# EAGLE board 64panel (EAGLE 9.1.0)
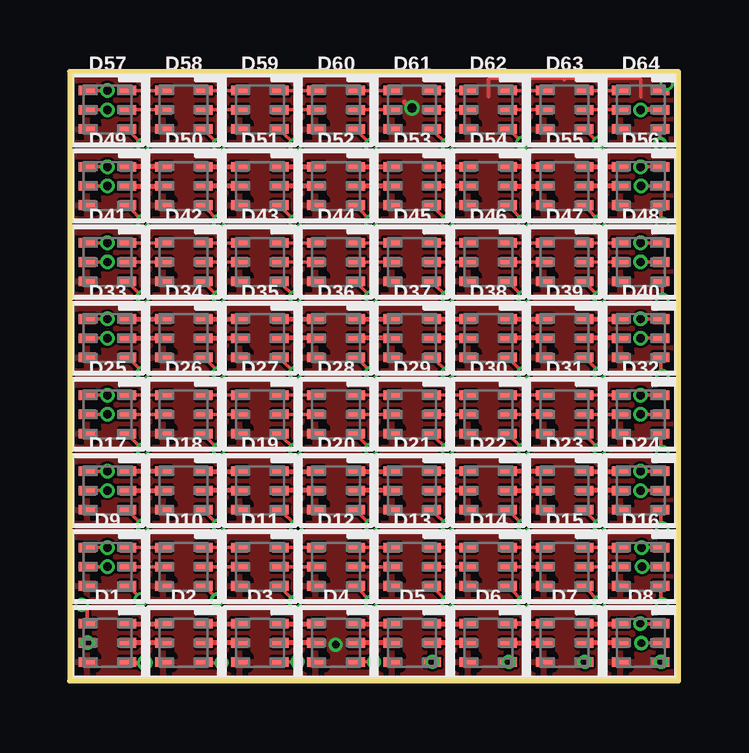
[diagram p0: board, top side]
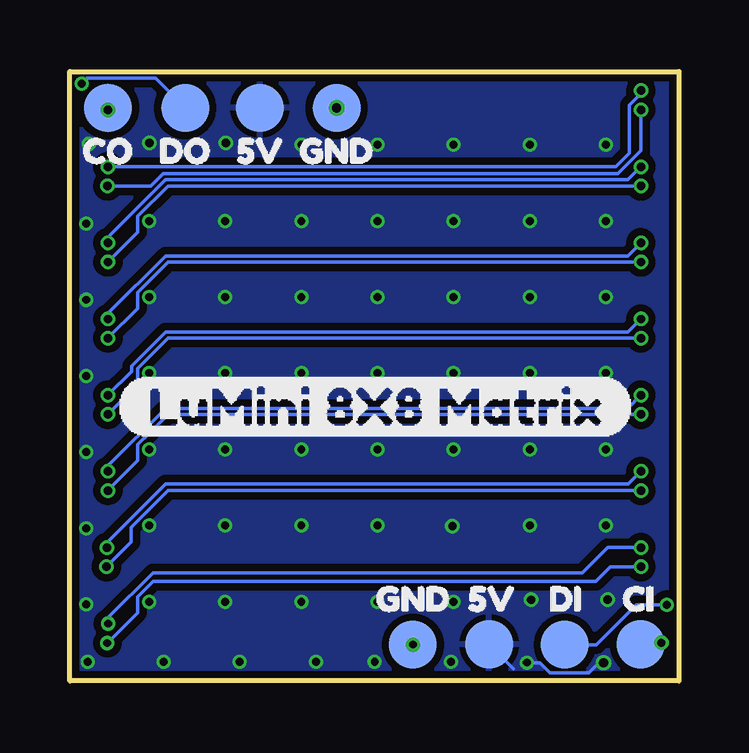
[diagram p1: board, bottom side, seen from below]

Size 25.4 x 25.4 mm. Coordinates in mm from the lower left corner, seen from the top.
Outline: 0,0 25.4,0 25.4,25.4 0,25.4 0,0
Copper layers (1*16): Top 0.035mm / dielectric 1.5mm / Bottom 0.035mm
Design rules "SparkFun-2-layer-FAB-LIMIT": minimum track width 4mil, minimum drill 6mil, track to track 4mil, track to pad 4mil, pad to pad 4mil, via to via 4mil, smd to smd 4mil, copper to edge 4mil, drill to drill 4mil, minimum pad ring 5mil, minimum via ring 5mil, stop-mask expansion 4mil, vias tented up to drill 25mil, thermal gap 10mil

## Footprints (pad centres in the part's own frame; a part is rotated, then mirrored left to right if it is on the bottom)
APA102-2020 = smd 0.7 x 0.4: CKI -0.85,0; CKO 0.85,0; GND -0.85,-0.8; SDI -0.85,0.8; SDO 0.85,0.8; VDD 0.85,-0.8
CIRCULARPAD = smd 2 x 2: P$1 0,0

## Placement (x,y rotation side)
D1  APA1022020  [APA102-2020]  1.59,1.59 0 top
D2  APA1022020  [APA102-2020]  4.76,1.59 0 top
D3  APA1022020  [APA102-2020]  7.94,1.59 0 top
D4  APA1022020  [APA102-2020]  11.11,1.59 0 top
D5  APA1022020  [APA102-2020]  14.29,1.59 0 top
D6  APA1022020  [APA102-2020]  17.46,1.59 0 top
D7  APA1022020  [APA102-2020]  20.64,1.59 0 top
D8  APA1022020  [APA102-2020]  23.81,1.59 0 top
D9  APA1022020  [APA102-2020]  1.59,4.76 0 top
D10  APA1022020  [APA102-2020]  4.76,4.76 0 top
D11  APA1022020  [APA102-2020]  7.94,4.76 0 top
D12  APA1022020  [APA102-2020]  11.11,4.76 0 top
D13  APA1022020  [APA102-2020]  14.29,4.76 0 top
D14  APA1022020  [APA102-2020]  17.46,4.76 0 top
D15  APA1022020  [APA102-2020]  20.64,4.76 0 top
D16  APA1022020  [APA102-2020]  23.81,4.76 0 top
D17  APA1022020  [APA102-2020]  1.59,7.94 0 top
D18  APA1022020  [APA102-2020]  4.76,7.94 0 top
D19  APA1022020  [APA102-2020]  7.94,7.94 0 top
D20  APA1022020  [APA102-2020]  11.11,7.94 0 top
D21  APA1022020  [APA102-2020]  14.29,7.94 0 top
D22  APA1022020  [APA102-2020]  17.46,7.94 0 top
D23  APA1022020  [APA102-2020]  20.64,7.94 0 top
D24  APA1022020  [APA102-2020]  23.81,7.94 0 top
D25  APA1022020  [APA102-2020]  1.59,11.11 0 top
D26  APA1022020  [APA102-2020]  4.76,11.11 0 top
D27  APA1022020  [APA102-2020]  7.94,11.11 0 top
D28  APA1022020  [APA102-2020]  11.11,11.11 0 top
D29  APA1022020  [APA102-2020]  14.29,11.11 0 top
D30  APA1022020  [APA102-2020]  17.46,11.11 0 top
D31  APA1022020  [APA102-2020]  20.64,11.11 0 top
D32  APA1022020  [APA102-2020]  23.81,11.11 0 top
D33  APA1022020  [APA102-2020]  1.59,14.29 0 top
D34  APA1022020  [APA102-2020]  4.76,14.29 0 top
D35  APA1022020  [APA102-2020]  7.94,14.29 0 top
D36  APA1022020  [APA102-2020]  11.11,14.29 0 top
D37  APA1022020  [APA102-2020]  14.29,14.29 0 top
D38  APA1022020  [APA102-2020]  17.46,14.29 0 top
D39  APA1022020  [APA102-2020]  20.64,14.29 0 top
D40  APA1022020  [APA102-2020]  23.81,14.29 0 top
D41  APA1022020  [APA102-2020]  1.59,17.46 0 top
D42  APA1022020  [APA102-2020]  4.76,17.46 0 top
D43  APA1022020  [APA102-2020]  7.94,17.46 0 top
D44  APA1022020  [APA102-2020]  11.11,17.46 0 top
D45  APA1022020  [APA102-2020]  14.29,17.46 0 top
D46  APA1022020  [APA102-2020]  17.46,17.46 0 top
D47  APA1022020  [APA102-2020]  20.64,17.46 0 top
D48  APA1022020  [APA102-2020]  23.81,17.46 0 top
D49  APA1022020  [APA102-2020]  1.59,20.64 0 top
D50  APA1022020  [APA102-2020]  4.76,20.64 0 top
D51  APA1022020  [APA102-2020]  7.94,20.64 0 top
D52  APA1022020  [APA102-2020]  11.11,20.64 0 top
D53  APA1022020  [APA102-2020]  14.29,20.64 0 top
D54  APA1022020  [APA102-2020]  17.46,20.64 0 top
D55  APA1022020  [APA102-2020]  20.64,20.64 0 top
D56  APA1022020  [APA102-2020]  23.81,20.64 0 top
D57  APA1022020  [APA102-2020]  1.59,23.81 0 top
D58  APA1022020  [APA102-2020]  4.76,23.81 0 top
D59  APA1022020  [APA102-2020]  7.94,23.81 0 top
D60  APA1022020  [APA102-2020]  11.11,23.81 0 top
D61  APA1022020  [APA102-2020]  14.29,23.81 0 top
D62  APA1022020  [APA102-2020]  17.46,23.81 0 top
D63  APA1022020  [APA102-2020]  20.64,23.81 0 top
D64  APA1022020  [APA102-2020]  23.81,23.81 0 top
FRAME1  FRAME-LEDGER  [CREATIVE_COMMONS]  20.32,-8.89 0 top  (outside the outline)
J1  LED_PADCIRCULARPAD  [CIRCULARPAD]  23.81,23.89 0 bottom
J2  LED_PADCIRCULARPAD  [CIRCULARPAD]  20.59,23.89 0 bottom
J3  LED_PADCIRCULARPAD  [CIRCULARPAD]  4.76,1.51 0 bottom
J4  LED_PADCIRCULARPAD  [CIRCULARPAD]  1.6,1.52 0 bottom
J5  LED_PADCIRCULARPAD  [CIRCULARPAD]  7.92,1.52 0 bottom
J6  LED_PADCIRCULARPAD  [CIRCULARPAD]  14.27,23.89 0 bottom
J7  LED_PADCIRCULARPAD  [CIRCULARPAD]  11.1,1.51 0 bottom
J8  LED_PADCIRCULARPAD  [CIRCULARPAD]  17.48,23.89 0 bottom
LOGO1  SFE_LOGO_NAME_FLAME.2_INCH  [SFE_LOGO_NAME_FLAME_.2]  10.16,-17.78 0 top  (outside the outline)
U$1  [5V5]  9.69,3.43 0 bottom
U$2  [5V5]  19.35,22.1 0 bottom
U$3  [CI1]  3.28,3.43 0 bottom
U$4  [CO3]  25.77,22.1 0 bottom
U$5  [DI2]  6.32,3.43 0 bottom
U$6  [DO4]  22.59,22.1 0 bottom
U$7  [GND6]  16.73,22.1 0 bottom
U$8  [GND6]  13.53,3.43 0 bottom
U$9  [LUMINI_8X8_MATRIX0]  23.5,11.43 0 bottom

## Library data of the parts
D1-D64 = SparkFun-LED; PROD_ID: DIO-13883
FRAME1 LOGO1 = SparkFun-Aesthetics
J1-J8 = Andy
U$1-U$9 = buzzard_labels (4)

## Nets
5V: D1.VDD D2.VDD D3.VDD D4.VDD D5.VDD D6.VDD D7.VDD D8.VDD D9.VDD D10.VDD D11.VDD D12.VDD D13.VDD D14.VDD D15.VDD D16.VDD D17.VDD D18.VDD D19.VDD D20.VDD D21.VDD D22.VDD D23.VDD D24.VDD D25.VDD D26.VDD D27.VDD D28.VDD D29.VDD D30.VDD D31.VDD D32.VDD D33.VDD D34.VDD D35.VDD D36.VDD D37.VDD D38.VDD D39.VDD D40.VDD D41.VDD D42.VDD D43.VDD D44.VDD D45.VDD D46.VDD D47.VDD D48.VDD D49.VDD D50.VDD D51.VDD D52.VDD D53.VDD D54.VDD D55.VDD D56.VDD D57.VDD D58.VDD D59.VDD D60.VDD D61.VDD D62.VDD D63.VDD D64.VDD J5.P$1 J8.P$1
CI: D1.CKI J4.P$1
CO: D64.CKO J1.P$1
CT1: D9.CKO D10.CKI
CT2: D18.CKO D19.CKI
CT3: D27.CKO D28.CKI
CT4: D36.CKO D37.CKI
CT5: D45.CKO D46.CKI
CT6: D54.CKO D55.CKI
CT7: D63.CKO D64.CKI
DI: D1.SDI J3.P$1
DO: D64.SDO J2.P$1
DT1: D9.SDO D10.SDI
DT2: D18.SDO D19.SDI
DT3: D27.SDO D28.SDI
DT4: D36.SDO D37.SDI
DT5: D45.SDO D46.SDI
DT6: D54.SDO D55.SDI
DT7: D63.SDO D64.SDI
GND: D1.GND D2.GND D3.GND D4.GND D5.GND D6.GND D7.GND D8.GND D9.GND D10.GND D11.GND D12.GND D13.GND D14.GND D15.GND D16.GND D17.GND D18.GND D19.GND D20.GND D21.GND D22.GND D23.GND D24.GND D25.GND D26.GND D27.GND D28.GND D29.GND D30.GND D31.GND D32.GND D33.GND D34.GND D35.GND D36.GND D37.GND D38.GND D39.GND D40.GND D41.GND D42.GND D43.GND D44.GND D45.GND D46.GND D47.GND D48.GND D49.GND D50.GND D51.GND D52.GND D53.GND D54.GND D55.GND D56.GND D57.GND D58.GND D59.GND D60.GND D61.GND D62.GND D63.GND D64.GND J6.P$1 J7.P$1
N$1: D1.SDO D2.SDI
N$2: D1.CKO D2.CKI
N$5: D2.SDO D3.SDI
N$6: D2.CKO D3.CKI
N$7: D3.SDO D4.SDI
N$8: D3.CKO D4.CKI
N$9: D4.SDO D5.SDI
N$10: D4.CKO D5.CKI
N$11: D5.SDO D6.SDI
N$12: D5.CKO D6.CKI
N$13: D6.SDO D7.SDI
N$14: D6.CKO D7.CKI
N$15: D7.SDO D8.SDI
N$16: D7.CKO D8.CKI
N$17: D8.SDO D9.SDI
N$18: D8.CKO D9.CKI
N$21: D10.SDO D11.SDI
N$22: D10.CKO D11.CKI
N$23: D11.SDO D12.SDI
N$24: D11.CKO D12.CKI
N$25: D12.SDO D13.SDI
N$26: D12.CKO D13.CKI
N$27: D13.SDO D14.SDI
N$28: D13.CKO D14.CKI
N$29: D14.SDO D15.SDI
N$30: D14.CKO D15.CKI
N$31: D15.SDO D16.SDI
N$32: D15.CKO D16.CKI
N$33: D16.SDO D17.SDI
N$34: D16.CKO D17.CKI
N$35: D17.SDO D18.SDI
N$36: D17.CKO D18.CKI
N$37: D19.SDO D20.SDI
N$38: D19.CKO D20.CKI
N$39: D20.SDO D21.SDI
N$40: D20.CKO D21.CKI
N$41: D21.SDO D22.SDI
N$42: D21.CKO D22.CKI
N$43: D22.SDO D23.SDI
N$44: D22.CKO D23.CKI
N$45: D23.SDO D24.SDI
N$46: D23.CKO D24.CKI
N$47: D24.SDO D25.SDI
N$48: D24.CKO D25.CKI
N$49: D25.SDO D26.SDI
N$50: D25.CKO D26.CKI
N$51: D26.SDO D27.SDI
N$52: D26.CKO D27.CKI
N$53: D28.SDO D29.SDI
N$54: D28.CKO D29.CKI
N$55: D29.SDO D30.SDI
N$56: D29.CKO D30.CKI
N$57: D30.SDO D31.SDI
N$58: D30.CKO D31.CKI
N$59: D31.SDO D32.SDI
N$60: D31.CKO D32.CKI
N$61: D32.SDO D33.SDI
N$62: D32.CKO D33.CKI
N$63: D33.SDO D34.SDI
N$64: D33.CKO D34.CKI
N$65: D34.SDO D35.SDI
N$66: D34.CKO D35.CKI
N$67: D35.SDO D36.SDI
N$68: D35.CKO D36.CKI
N$69: D37.SDO D38.SDI
N$70: D37.CKO D38.CKI
N$71: D38.SDO D39.SDI
N$72: D38.CKO D39.CKI
N$73: D39.SDO D40.SDI
N$74: D39.CKO D40.CKI
N$75: D40.SDO D41.SDI
N$76: D40.CKO D41.CKI
N$77: D41.SDO D42.SDI
N$78: D41.CKO D42.CKI
N$79: D42.SDO D43.SDI
N$80: D42.CKO D43.CKI
N$81: D43.SDO D44.SDI
N$82: D43.CKO D44.CKI
N$83: D44.SDO D45.SDI
N$84: D44.CKO D45.CKI
N$85: D46.SDO D47.SDI
N$86: D46.CKO D47.CKI
N$87: D47.SDO D48.SDI
N$88: D47.CKO D48.CKI
N$89: D48.SDO D49.SDI
N$90: D48.CKO D49.CKI
N$91: D49.SDO D50.SDI
N$92: D49.CKO D50.CKI
N$93: D50.SDO D51.SDI
N$94: D50.CKO D51.CKI
N$95: D51.SDO D52.SDI
N$96: D51.CKO D52.CKI
N$97: D52.SDO D53.SDI
N$98: D52.CKO D53.CKI
N$99: D53.SDO D54.SDI
N$100: D53.CKO D54.CKI
N$101: D55.SDO D56.SDI
N$102: D55.CKO D56.CKI
N$103: D56.SDO D57.SDI
N$104: D56.CKO D57.CKI
N$105: D57.SDO D58.SDI
N$106: D57.CKO D58.CKI
N$107: D58.SDO D59.SDI
N$108: D58.CKO D59.CKI
N$109: D59.SDO D60.SDI
N$110: D59.CKO D60.CKI
N$111: D60.SDO D61.SDI
N$112: D60.CKO D61.CKI
N$113: D61.SDO D62.SDI
N$114: D61.CKO D62.CKI
N$115: D62.SDO D63.SDI
N$116: D62.CKO D63.CKI

## Tracks (layer width: path | path; a pad name or v marks a point on that pad's centre or on a via)
5V  (via drill 0.33, 0.35, 0.38)
  Top 0.152: 2.39,3.91 D9.VDD | D9.VDD 2.44,3.91 | 2.39,0.74 D1.VDD 2.44,0.76 2.43,0.75 | 5.56,0.74 D2.VDD 5.64,0.76 v6.34,0.76 | 8.74,0.74 D3.VDD v9.51,0.79 | 15.09,0.74 D5.VDD v15.14,0.8 | 21.44,0.74 D7.VDD v21.49,0.8 | D12.VDD 11.96,3.91 v12.57,3.3 | v15.75,3.3 15.14,3.91 D13.VDD 15.09,3.91 | D14.VDD 18.31,3.91 v18.92,3.3 | v22.1,3.3 21.49,3.91 D15.VDD 21.44,3.91 | 5.56,3.91 D10.VDD | D10.VDD 5.61,3.91 | 2.39,7.09 D17.VDD 2.44,7.09 v3.05,6.48 | 5.56,7.09 D18.VDD 5.61,7.09 v6.22,6.48 | 8.74,7.09 D19.VDD | D19.VDD 8.79,7.09 | 11.91,7.09 D20.VDD 11.96,7.09 v12.57,6.48 | 8.74,3.91 D11.VDD 8.79,3.91 v9.4,3.3 | 15.09,7.09 D21.VDD 15.14,7.09 v15.75,6.48 | 18.26,7.09 D22.VDD 18.31,7.09 v18.92,6.48 | 21.44,7.09 D23.VDD 21.49,7.09 v22.1,6.48 | 2.39,19.79 D49.VDD 2.44,19.79 v3.05,19.18 | 5.56,19.79 D50.VDD 5.61,19.79 v6.22,19.18 | 8.74,19.79 D51.VDD 8.79,19.79 v9.4,19.18 | 11.91,19.79 D52.VDD 11.96,19.79 v12.57,19.18 | 15.09,19.79 D53.VDD 15.14,19.79 v15.75,19.18 | 18.26,19.79 D54.VDD 18.31,19.79 v18.92,19.18 | 21.44,19.79 D55.VDD 21.49,19.79 v22.1,19.18 | 2.39,22.96 D57.VDD 2.44,22.96 v3.05,22.35 | D58.VDD 5.61,22.96 v6.22,22.35 | 8.74,22.96 D59.VDD 8.79,22.96 v9.4,22.35 | 11.91,22.96 D60.VDD 11.96,22.96 v12.57,22.35 | 2.39,16.61 D41.VDD 2.44,16.61 v3.05,16 | 5.56,16.61 D42.VDD 5.61,16.61 v6.22,16 | 8.74,16.61 D43.VDD 8.79,16.61 v9.4,16 | 11.91,16.61 D44.VDD 11.96,16.61 v12.57,16 | 15.09,16.61 D45.VDD 15.14,16.61 v15.75,16 | 18.26,16.61 D46.VDD 18.31,16.61 v18.92,16 | 21.44,16.61 D47.VDD 21.49,16.61 v22.1,16 | D16.VDD 24.66,3.24 v24.71,3.19 | 2.39,10.26 D25.VDD 2.44,10.26 v3.05,9.65 | 5.56,10.26 D26.VDD 5.61,10.26 v6.22,9.65
  Top 0.152: 8.74,10.26 D27.VDD 8.79,10.26 v9.4,9.65 | 11.91,10.26 D28.VDD 11.96,10.26 v12.57,9.65 | 18.26,10.26 D30.VDD 18.31,10.26 v18.92,9.65 | 21.44,10.26 D31.VDD 21.49,10.26 v22.1,9.65 | 24.61,10.26 D32.VDD 24.66,9.59 v24.71,9.54 | 24.61,7.09 D24.VDD 24.66,6.41 v24.71,6.36 | D56.VDD 24.66,19.11 v24.71,19.06 | 21.44,22.96 D63.VDD | D63.VDD 21.49,22.96 | v22.1,12.83 22.1,12.88 D39.VDD 21.44,13.44 | v15.75,12.83 15.75,12.88 D37.VDD 15.09,13.44 | v12.57,12.83 12.57,12.88 D36.VDD 11.91,13.44 | D40.VDD 24.66,12.76 v24.71,12.71 | 18.26,22.96 D62.VDD v18.9,22.43 | v24.71,15.89 24.71,16.61 D48.VDD | 15.09,22.96 D61.VDD 15.14,22.96 v15.75,22.35 | D29.VDD 15.14,10.26 v15.75,9.65 | 18.26,13.44 D38.VDD 18.31,13.44 v18.92,12.83 | 8.74,13.44 D35.VDD 8.79,13.44 v9.4,12.83 | 5.56,13.44 D34.VDD 6.22,12.88 v6.22,12.83 | v12.69,0.79 | 11.91,0.74 D4.VDD v12.69,0.79 | v18.31,0.8 D6.VDD 18.26,0.74 | D8.VDD v24.66,0.8 | D33.VDD 3.05,12.88 v3.05,12.83 | D64.VDD 24.61,22.96 v24.61,22.38 | D19.VDD 9.45,6.48 v9.45,6.45 | D10.VDD 6.17,3.4 v6.17,3.38 | D9.VDD 2.98,3.42 v2.98,3.39 | D63.VDD 22.07,22.43 v22.09,22.43
  Top 0.203: D1.VDD 2.48,0.75 v3.14,0.75
  Bottom 0.152: J5.P$1 6.91,0.51 | 3.35,0.75 3.77,0.33 5.38,0.33 5.81,0.76 v6.34,0.76 | v9.51,0.79 9.51,0.78 9.53,0.76
  pour Bottom (isolate 0.305): 25.4,0 0,0 0,25.4 25.4,25.4
CI  (via drill 0.35)
  Bottom 0.152: D1.CKI 1.54,1.59 J4.P$1
  other vias: 0.74,1.59
CO  (via drill 0.35)
  Top 0.203: D64.CKO v23.81,23.81
  Bottom 0.203: J1.P$1 v23.81,23.81
CT1
  Top 0.152: D9.CKO D10.CKI
CT2
  Top 0.203: D19.CKI D18.CKO
CT3
  Top 0.152: D27.CKO D28.CKI
CT4
  Top 0.203: D37.CKI D36.CKO
CT5
  Top 0.152: D46.CKI D45.CKO
CT6
  Top 0.203: D54.CKO D55.CKI
CT7
  Top 0.152: D63.CKO D64.CKI
DI  (via drill 0.33)
  Top 0.152: D1.SDI 0.74,2.95 v0.51,3.17
  Bottom 0.152: v0.51,3.17 1.78,3.17 3.44,1.51 J3.P$1
DO  (via drill 0.33)
  Top 0.152: D64.SDO 24.66,24.66 v24.91,24.91
  Bottom 0.152: v24.91,24.91 24.69,25.12 21.82,25.12 J2.P$1
DT1
  Top 0.152: D10.SDI D9.SDO
DT2
  Top 0.203: D18.SDO D19.SDI
DT3
  Top 0.152: D27.SDO D28.SDI
DT4
  Top 0.203: D36.SDO D37.SDI
DT5
  Top 0.152: D45.SDO D46.SDI
DT6
  Top 0.203: D55.SDI D54.SDO
DT7
  Top 0.152: D64.SDI D63.SDO
GND  (via drill 0.33, 0.38)
  Top 0.152: 17.46,24.36 17.46,25.08 17.5,25.12 20.57,25.12 | 20.57,25.12 20.64,25.06 | 23.81,24.36 23.81,25.06 23.75,25.12 20.57,25.12
  Top 0.203: J6.P$1 14.21,23.89 13.97,24.13
  other vias: 11.1,1.51 14.27,23.89
  pour Top: 0,0 25.4,0 25.4,25.4 0,25.4
N$1
  Top 0.203: D1.SDO D2.SDI
N$2
  Top 0.203: D2.CKI D1.CKO
N$5
  Top 0.203: D2.SDO D3.SDI
N$6
  Top 0.203: D3.CKI D2.CKO
N$7
  Top 0.203: D3.SDO D4.SDI
N$8
  Top 0.203: D4.CKI D3.CKO
N$9
  Top 0.203: D4.SDO D5.SDI
N$10
  Top 0.203: D5.CKI D4.CKO
N$11
  Top 0.203: D5.SDO D6.SDI
N$12
  Top 0.203: D6.CKI D5.CKO
N$13
  Top 0.203: D7.SDI D6.SDO
N$14
  Top 0.203: D6.CKO D7.CKI
N$15
  Top 0.203: D7.SDO D8.SDI
N$16
  Top 0.203: D8.CKI D7.CKO
N$17  (via drill 0.33, 0.35)
  Top 0.152: v23.8,2.39 D8.SDO | D9.SDI v1.59,5.56
  Bottom 0.152: v1.59,5.56 2.97,5.56 4.02,4.51 21.93,4.51 23.8,2.64 v23.8,2.39
N$18  (via drill 0.33, 0.35)
  Top 0.152: D8.CKO 23.85,1.59 v23.84,1.57 | D9.CKI v1.59,4.76
  Bottom 0.152: v1.59,4.76 2.86,4.76 3.48,4.14 21.92,4.14 22.57,3.5 22.57,2.84 v23.84,1.57
N$21
  Top 0.152: D11.SDI D10.SDO
N$22
  Top 0.152: D10.CKO D11.CKI
N$23
  Top 0.152: D11.SDO D12.SDI
N$24
  Top 0.152: D12.CKI D11.CKO
N$25
  Top 0.152: D13.SDI D12.SDO
N$26
  Top 0.152: D12.CKO D13.CKI
N$27
  Top 0.152: D14.SDI D13.SDO
N$28
  Top 0.152: D13.CKO D14.CKI
N$29
  Top 0.152: D15.SDI D14.SDO
N$30
  Top 0.152: D14.CKO D15.CKI
N$31
  Top 0.152: D16.SDI D15.SDO
N$32
  Top 0.152: D16.CKI D15.CKO
N$33  (via drill 0.35)
  Top 0.152: D16.SDO v23.85,5.56 | v1.59,8.74 D17.SDI | D17.SDI
  Bottom 0.152: v23.85,5.56 23.85,5.77 21.4,8.22 2.11,8.22 v1.59,8.74
N$34  (via drill 0.35)
  Top 0.152: D16.CKO v23.88,4.76 | v1.59,7.94 D17.CKI
  Bottom 0.152: v1.59,7.94 21.31,7.94 22.85,6.4 22.85,5.79 v23.88,4.76
N$35
  Top 0.203: D18.SDI D17.SDO
N$36
  Top 0.203: D17.CKO D18.CKI
N$37
  Top 0.203: D19.SDO D20.SDI
N$38
  Top 0.203: D20.CKI D19.CKO
N$39
  Top 0.203: D20.SDO D21.SDI
N$40
  Top 0.203: D21.CKI D20.CKO
N$41
  Top 0.203: D21.SDO D22.SDI
N$42
  Top 0.203: D22.CKI D21.CKO
N$43
  Top 0.203: D23.SDI D22.SDO
N$44
  Top 0.203: D22.CKO D23.CKI
N$45
  Top 0.203: D23.SDO D24.SDI
N$46
  Top 0.203: D24.CKI D23.CKO
N$47  (via drill 0.35)
  Top 0.152: D25.SDI v1.59,11.91 | v23.81,8.74 D24.SDO
  Bottom 0.152: v1.59,11.91 2.13,11.37 21.41,11.37 23.81,8.96 v23.81,8.74
N$48  (via drill 0.35)
  Top 0.152: D24.CKO v23.81,7.94 | v1.59,11.11 D25.CKI
  Bottom 0.152: v23.81,7.94 22.57,9.18 22.57,9.85 22.29,10.12 21.3,11.11 v1.59,11.11
N$49
  Top 0.152: D25.SDO D26.SDI
N$50
  Top 0.152: D26.CKI D25.CKO
N$51
  Top 0.152: D26.SDO D27.SDI
N$52
  Top 0.152: D27.CKI D26.CKO
N$53
  Top 0.152: D28.SDO D29.SDI
N$54
  Top 0.152: D29.CKI D28.CKO
N$55
  Top 0.152: D29.SDO D30.SDI
N$56
  Top 0.152: D30.CKI D29.CKO
N$57
  Top 0.152: D31.SDI D30.SDO
N$58
  Top 0.152: D30.CKO D31.CKI
N$59
  Top 0.152: D31.SDO D32.SDI
N$60
  Top 0.152: D32.CKI D31.CKO
N$61  (via drill 0.35)
  Top 0.152: D32.SDO v23.81,11.91 | v1.59,15.09 D33.SDI | D33.SDI
  Bottom 0.152: v23.81,11.91 22.82,12.9 22.82,13.13 21.41,14.54 2.13,14.54 v1.59,15.09
N$62  (via drill 0.35)
  Top 0.152: D33.CKI v1.59,14.29 | v23.81,11.11 D32.CKO
  Bottom 0.152: v1.59,14.29 21.3,14.29 22.57,13.02 22.57,12.36 v23.81,11.11
N$63
  Top 0.203: D33.SDO D34.SDI
N$64
  Top 0.203: D33.CKO D34.CKI
N$65
  Top 0.203: D34.SDO D35.SDI
N$66
  Top 0.203: D34.CKO D35.CKI
N$67
  Top 0.203: D35.SDO D36.SDI
N$68
  Top 0.203: D36.CKI D35.CKO
N$69
  Top 0.203: D37.SDO D38.SDI
N$70
  Top 0.203: D38.CKI D37.CKO
N$71
  Top 0.203: D38.SDO D39.SDI
N$72
  Top 0.203: D39.CKI D38.CKO
N$73
  Top 0.203: D39.SDO D40.SDI
N$74
  Top 0.203: D40.CKI D39.CKO
N$75  (via drill 0.35)
  Top 0.152: D40.SDO v23.81,15.09 | v1.59,18.26 D41.SDI
  Bottom 0.152: v23.81,15.09 23.81,15.31 21.41,17.72 2.13,17.72 v1.59,18.26
N$76  (via drill 0.35)
  Top 0.152: D41.CKI v1.59,17.46 | v23.81,14.29 D40.CKO
  Bottom 0.152: v1.59,17.46 21.3,17.46 22.57,16.2 22.57,15.53 v23.81,14.29
N$77
  Top 0.152: D41.SDO D42.SDI
N$78
  Top 0.152: D42.CKI D41.CKO
N$79
  Top 0.152: D42.SDO D43.SDI
N$80
  Top 0.152: D43.CKI D42.CKO
N$81
  Top 0.152: D43.SDO D44.SDI
N$82
  Top 0.152: D44.CKI D43.CKO
N$83
  Top 0.152: D44.SDO D45.SDI
N$84
  Top 0.152: D45.CKI D44.CKO
N$85
  Top 0.152: D46.SDO D47.SDI
N$86
  Top 0.152: D47.CKI D46.CKO
N$87
  Top 0.152: D48.SDI D47.SDO
N$88
  Top 0.152: D47.CKO D48.CKI
N$89  (via drill 0.35)
  Top 0.152: D48.SDO v23.81,18.26 | v1.59,21.44 D49.SDI | D49.SDI
  Bottom 0.152: v23.81,18.26 23.81,18.49 21.41,20.89 2.13,20.89 v1.59,21.44
N$90  (via drill 0.35)
  Top 0.152: D49.CKI v1.59,20.64 | v23.81,17.46 D48.CKO
  Bottom 0.152: v1.59,20.64 21.3,20.64 22.57,19.37 22.57,18.71 v23.81,17.46
N$91
  Top 0.203: D50.SDI D49.SDO
N$92
  Top 0.203: D49.CKO D50.CKI
N$93
  Top 0.203: D50.SDO D51.SDI
N$94
  Top 0.203: D51.CKI D50.CKO
N$95
  Top 0.203: D51.SDO D52.SDI
N$96
  Top 0.203: D52.CKI D51.CKO
N$97
  Top 0.203: D52.SDO D53.SDI
N$98
  Top 0.203: D53.CKI D52.CKO
N$99
  Top 0.203: D53.SDO D54.SDI
N$100
  Top 0.203: D54.CKI D53.CKO
N$101
  Top 0.203: D55.SDO D56.SDI
N$102
  Top 0.203: D56.CKI D55.CKO
N$103  (via drill 0.35)
  Top 0.152: D57.SDI v1.59,24.61 | v1.59,24.61 | v23.81,21.44 D56.SDO
  Bottom 0.152: v1.59,24.61 1.59,24.49 2.07,24.01 2.07,22 2.62,21.44 v23.81,21.44
N$104  (via drill 0.35)
  Top 0.152: D56.CKO v23.82,20.64 | v1.59,23.81 D57.CKI
  Bottom 0.152: v23.82,20.64 22.02,20.64 21.51,21.14 2.56,21.14 1.59,22.12 v1.59,23.81
N$105
  Top 0.152: D57.SDO D58.SDI
N$106
  Top 0.152: D57.CKO D58.CKI
N$107
  Top 0.152: D58.SDO D59.SDI
N$108
  Top 0.152: D59.CKI D58.CKO
N$109
  Top 0.152: D59.SDO D60.SDI
N$110
  Top 0.152: D60.CKI D59.CKO
N$111
  Top 0.152: D60.SDO D61.SDI
N$112
  Top 0.152: D61.CKI D60.CKO
N$113
  Top 0.152: D61.SDO D62.SDI
N$114
  Top 0.152: D62.CKI D61.CKO
N$115
  Top 0.152: D62.SDO D63.SDI
N$116
  Top 0.152: D63.CKI D62.CKO